# Altium PCB HEBoard_Ver3.PcbDoc
Units mm, origin at the board's own origin, x right, y up, seen from the top; angles counter-clockwise.
Board outline 44.9 x 65 mm, 2 copper layers (Top Layer, Bottom Layer); 22 components, 17 nets, 116 pads, 36 vias.
Unrouted connection lines stored in the file: 3.
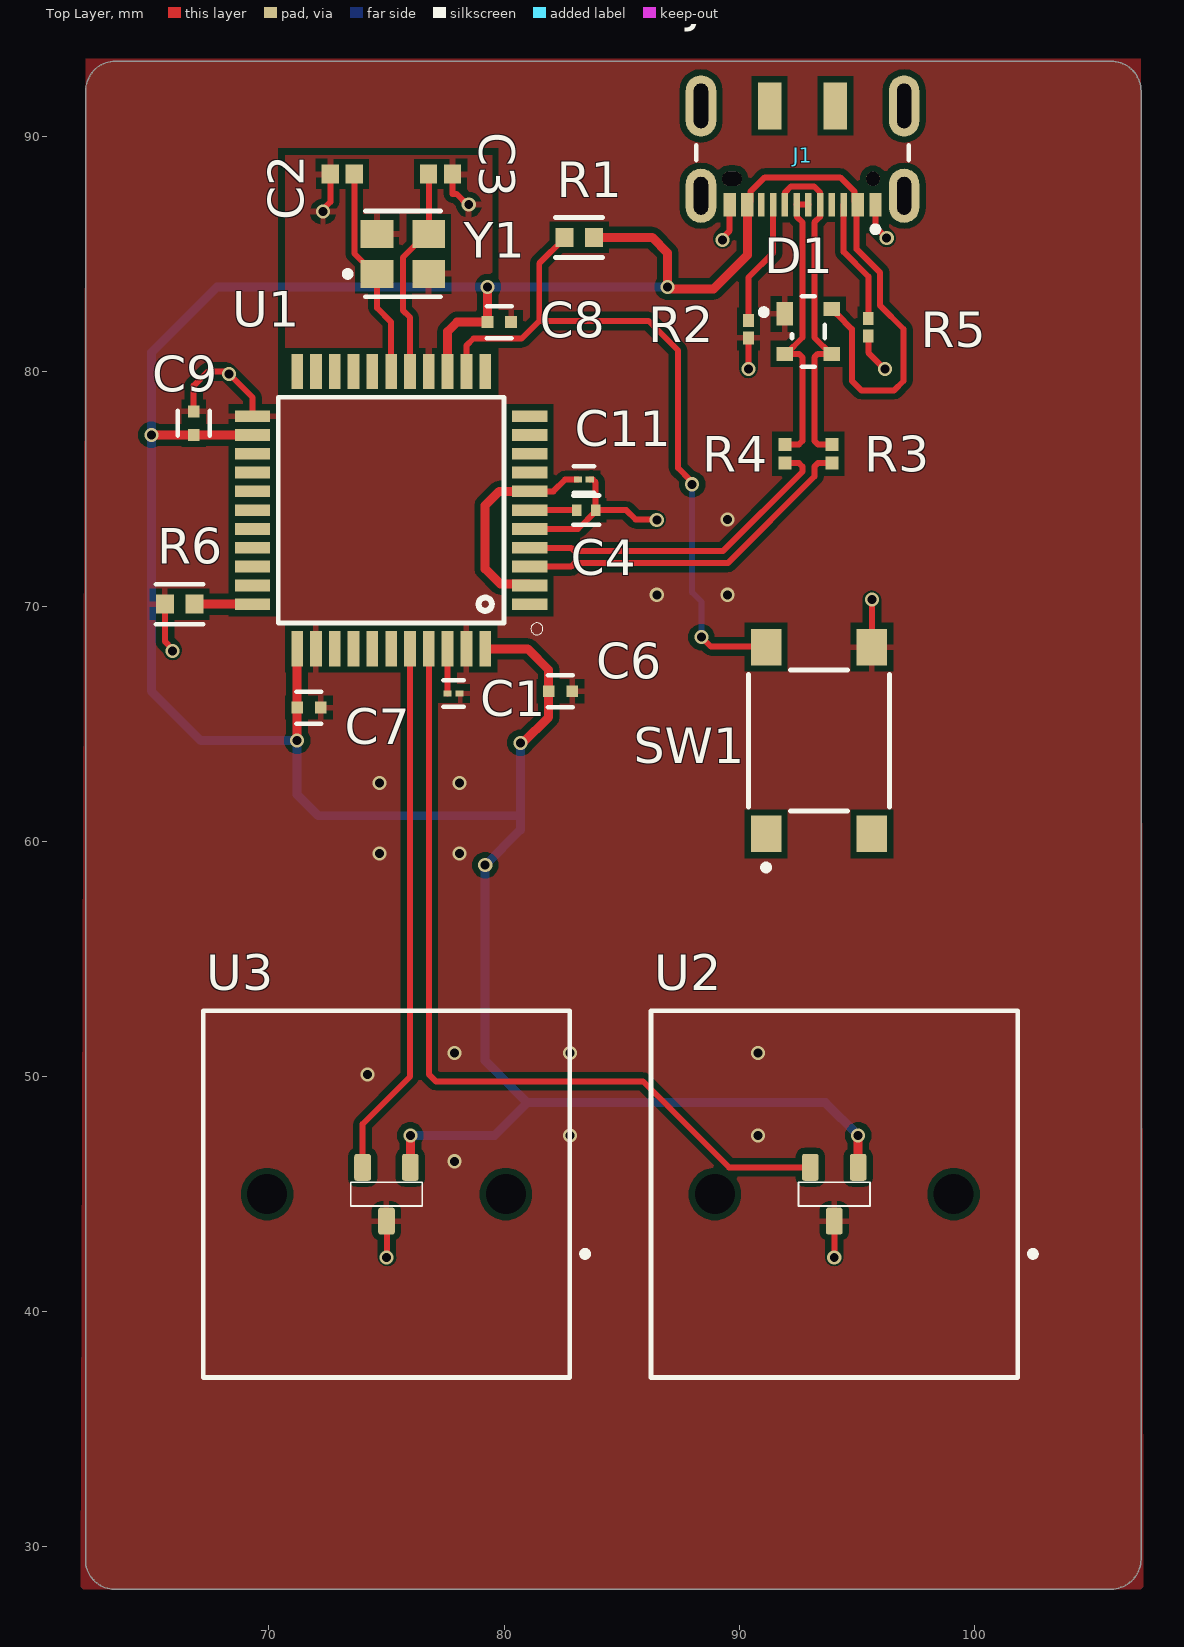
[diagram p0: Top Layer view]
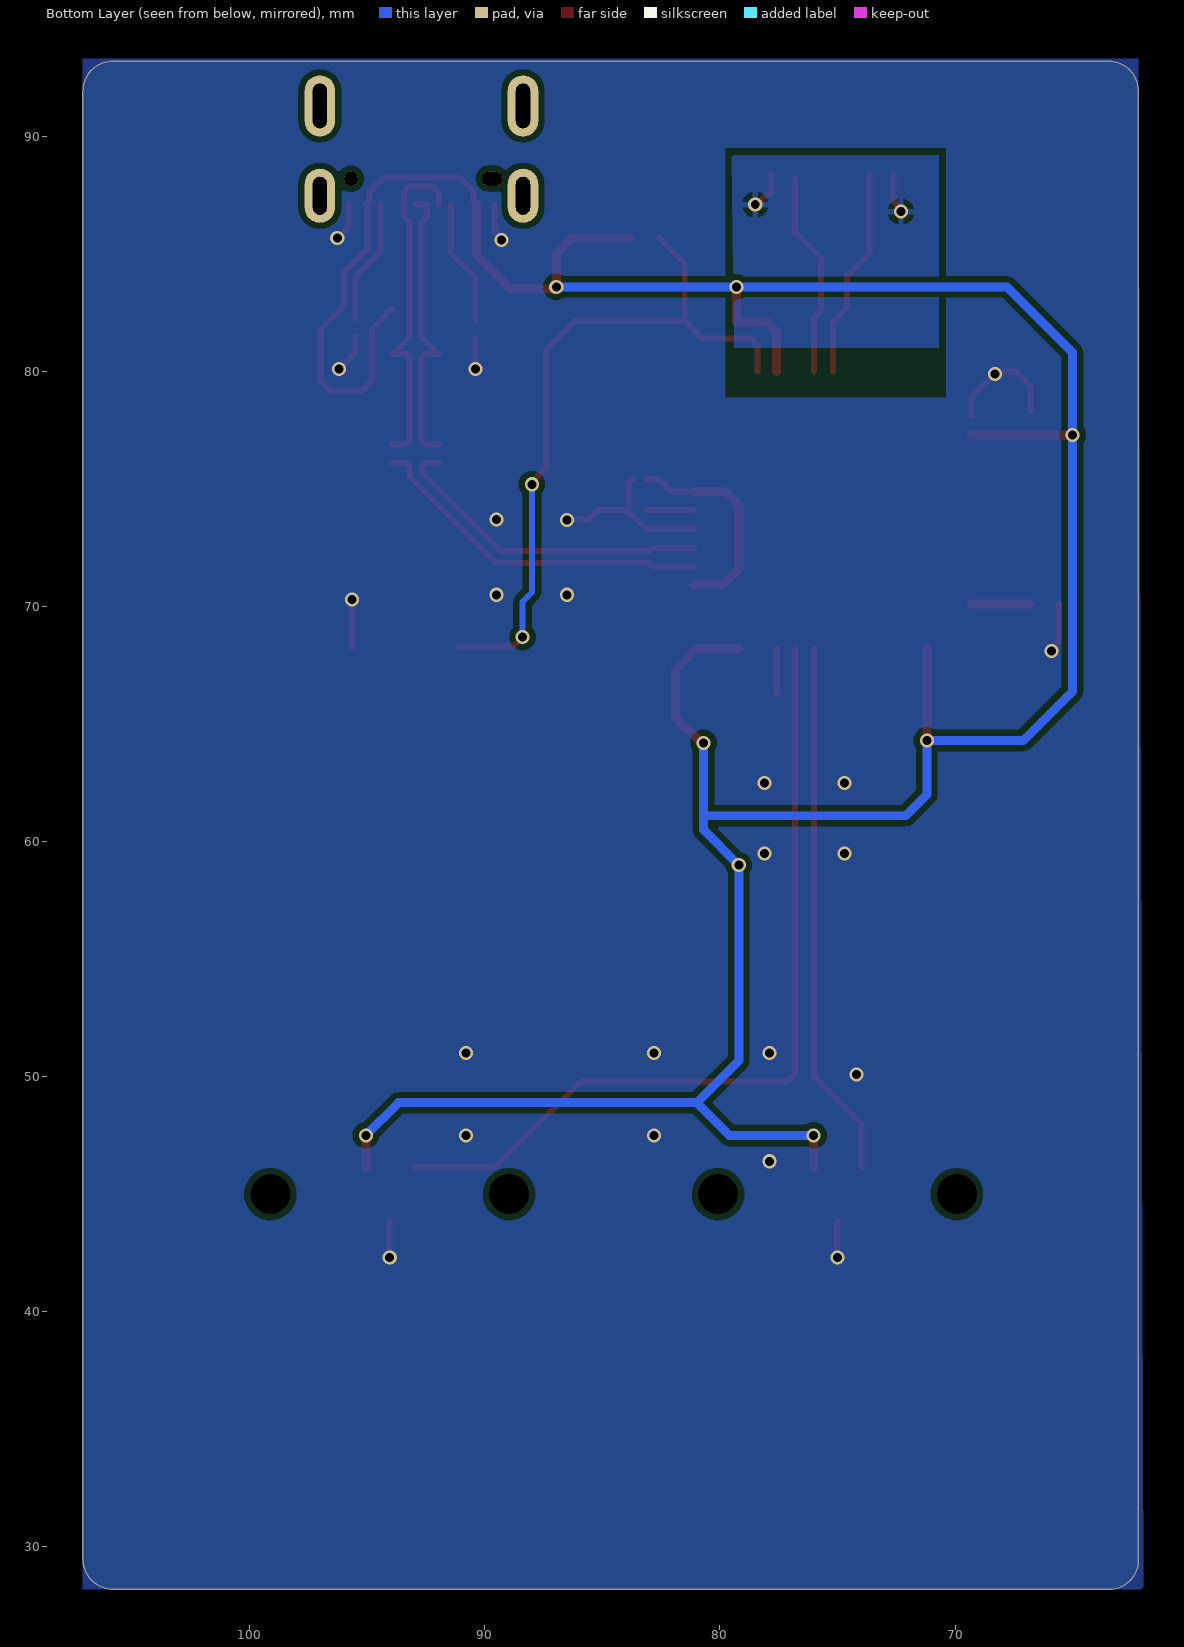
[diagram p1: Bottom Layer view, seen from below]
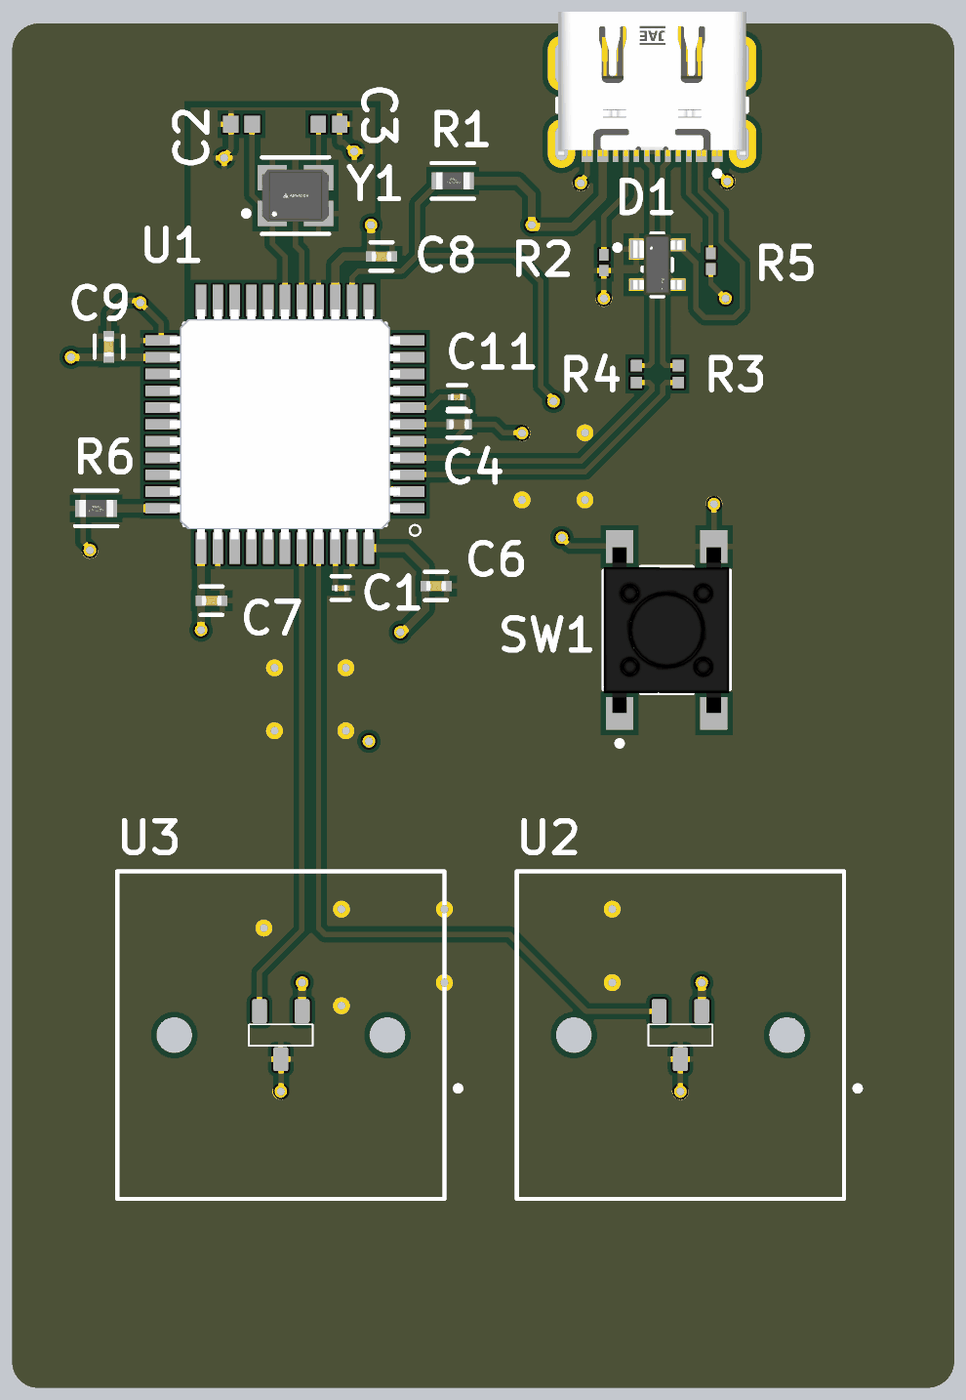
[diagram p2: 3D render of the assembled board from above, using the file's embedded part models]

## Layer stack, top to bottom
Top Solder: solder mask 0.0102, Solder Resist, Dk 3.5
Top Layer: signal copper 0.0356
Dielectric 1: dielectric 0.32, FR-4, Dk 4.8
Bottom Layer: signal copper 0.0356
Bottom Solder: solder mask 0.0102, Solder Resist, Dk 3.5

## Board outline
62.2,29.423 ccw(c63.423,29.423) 63.423,28.2 105.83,28.2 ccw(c105.83,29.47) 107.1,29.47 107.1,91.93 ccw(c105.83,91.93) 105.83,93.2 63.47,93.2 ccw(c63.47,91.93) 62.2,91.93

## Design rules (kind name [scope] priority, off if disabled: settings)
Clearance [All] p1: gap=0.254 ignorepadtopadclearanceinfootprint=FALSE except(0: Arc-Hole Track-Hole SMDPad-Hole THPad-Hole Via-Hole Fill-Hole Poly-Hole Region-Hole Text-Hole; 0.14: Arc-Arc Arc-Track Arc-SMDPad Arc-Text Track-Track Track-SMDPad Track-Text SMDPad-SMDPad SMDPad-Text THPad-Text Via-Text Fill-Text Poly-Text Region-Text Text-Text)
DiffPairsRouting [All] p1: maxlimit=100 minlimit=0.254 mostfreqgap=0.254 toplayer_mingap=0 toplayer_minwidth=0.254 toplayer_maxwidth=0.381 toplayer_prefwidth=0.254 bottomlayer_maxgap=0.254 bottomlayer_minwidth=0.381 bottomlayer_maxwidth=0.381 bottomlayer_prefwidth=0.381 maxuncoupledlength=12.7
MinimumSolderMaskSliver [All] p1: minsoldermaskwidth=0.07
PlaneConnect [All] p1: planeconnectstyle=Direct reliefexpansion=0.508 reliefentries=4 reliefconductorwidth=0.254 reliefairgap=0.254
PolygonConnect [All] p1: thpad.connectstyle=Relief thpad.reliefconductorwidth=0.254 thpad.reliefentries=4 thpad.polygonreliefangle="90 Angle" thpad.airgapwidth=0.254 smdpad.connectstyle=Relief smdpad.reliefconductorwidth=0.254 smdpad.reliefentries=4 smdpad.polygonreliefangle="90 Angle" smdpad.airgapwidth=0.254 via.connectstyle=Direct via.reliefconductorwidth=0.254 via.reliefentries=4 via.polygonreliefangle="90 Angle" via.airgapwidth=0.254
RoutingVias [All] p1: holewidth=0.711 width=1.27 viastyle="Through Hole" minholewidth=0.3 minwidth=0.6 maxholewidth=0.711 maxwidth=1.27
SilkToSolderMaskClearance [IsPad] p1: minsilkscreentomaskgap=0.025 clearancetoexposedcopper=TRUE
SolderMaskExpansion [All] p1: expansion=0.102 istentingtop=FALSE
Width [InNet('D_P')] p1: maxlimit=0.381 minlimit=0.254 preferedwidth=0.254 toplayer_maxwidth=0.254 minimp=50.000000 maximp=50.000000 favimp=50.000000
26 further rules are at their usual default settings.

## Classes and differential pairs
differential pair D: +D_P -D_N

## Components (designator, comment, footprint, x,y, rotation, side; value= is the part's Value field where it differs from the comment)
C1 "0.1uF" FP-GRM033-0_03-IPC_C 77.854,66.3 r0 top
C2 "22pF" CAPC1006X50X20ML10T10 73.125,88.4 r0 top
C3 "22pF" CAPC1006X50X20ML10T10 77.3,88.4 r180 top
C4 "1uF" FP-GRM15-0_1-MFG 83.5,74.1 r0 top
C6 "0.1uF" FP-CC0402-MFG 82.4,66.4 r0 top value="100 nF"
C7 "0.1uF" FP-CC0402-MFG 71.7,65.7 r0 top value="100 nF"
C8 "0.1uF" FP-CC0402-MFG 79.8,82.1 r0 top value="100 nF"
C9 "0.1uF" FP-CC0402-MFG 66.8,77.8 r90 top value="100 nF"
C11 "0.1uF" FP-GRM033-0_03-IPC_C 83.4,75.4 r0 top
D1 "PRTR5V0U2X,215" FP-SOT143B-MFG 92.95,81.7 r0 top
J1 "DX07S016JA1R1500" FP-DX07S016JA1R1500-MFG 92.7,90.3 r180 top
R1 "10K" FP-CRGP0603-IPC_C 83.2,85.7 r0 top value=10KΩ
R2 "5.1k" RESC0603X26X15ML03T05 90.4,81.8 r90 top
R3 "22R 1% 0201(0603)" RESC0201(0603)_M 93.95,76.5 r90 top value="22.00 Ohm"
R4 "22R 1% 0201(0603)" RESC0201(0603)_M 91.95,76.5 r90 top value="22.00 Ohm"
R5 "5.1k" RESC0603X26X15ML03T05 95.5,81.875 r90 top
R6 "10K" FP-CRGP0603-IPC_C 66.2,70.1 r0 top value=10KΩ
SW1 "" FP-PTS645SM43SMTR92LFS-MFG 93.4,64.3 r90 top
U1 "ATMEGA32U4-AU" QFP80P1200X1200X120-44N 75.2,74.1 r180 top
U2 "SS39ET" CHRY-MX1A-11NW_V 94.05,45 r180 top
U3 "SS39ET" CHRY-MX1A-11NW_V 75,45 r180 top
Y1 "16 MHz" FP-ABM8G-MFG 75.7,85 r0 top

## Footprints (in the part's own frame and the unit in brackets; to place one, negate y for a bottom-side part, rotate by r counter-clockwise, add the part's x,y. Pads: shape width x height; smd on the part's side, far side on the other; paste and mask are expansions set on the pad)
CAPC1006X50X20ML10T10 [mm] "Chip Capacitor, 2-Leads, Body 1.00x0.55mm, IPC Low Density"
  rect 0.74x0.8 smd: 1(-0.51,0) 2(0.51,0)
  body extent -0.55,-0.33 0.55,0.32, height 0.5
CHRY-MX1A-11NW_V [mil] "THD, 2-Leads, Body 15.6x15.6mm"
  rrect30% 28x45 smd: 1(-40,-45) 2(40,-45) 3(0,45)
  round 0 hole 67 unplated paste+0: MH2(-200,0) MH3(200,0)
  silkscreen extent -338,-307 307,307, body extent -307,-307 307,307, height 598
FP-ABM8G-MFG [mm]
  rect 1.4x1.2 smd paste+0 mask+0: 1(-1.1,-0.85) 2(1.1,-0.85) 3(1.1,0.85) 4(-1.1,0.85)
  silkscreen extent -2.47,-1.83 1.6,1.83, body extent -1.9,-1.55 1.9,1.55, height 0.25
FP-CC0402-MFG [mm]
  rect 0.5x0.5 smd paste+0 mask+0: 1(-0.5,0) 2(0.5,0)
  silkscreen extent -0.53,-0.68 0.53,0.67, body extent -0.87,-0.48 0.87,0.48, height 0.25
FP-CRGP0603-IPC_C [mm]
  rect 0.758x0.812 smd paste+0 mask+0: 1(-0.627,0) 2(0.627,0)
  silkscreen extent -1.01,-0.85 1.01,0.85, body extent -1.11,-0.55 1.11,0.55, height 0.25
FP-DX07S016JA1R1500-MFG [mm]
  rrect100% 1.3x2.3 hole 1.6 slot 0.6 at 0 deg paste-1000 mask+0: 1(-4.32,2.825) 2(4.32,2.825)
  rrect100% 1.3x2.6 hole 1.9 slot 0.6 at 0 deg paste-1000 mask+0: 3(-4.32,-1) 6(4.32,-1)
  rect 1x2 smd paste+0 mask+0: 4(-1.4,-1) 5(1.4,-1)
  rect 0.52x1 smd paste+0 mask+0: A1/B12(-3.1,3.2) A4/B9(-2.35,3.2) A12/B1(3.1,3.2) B4/A9(2.35,3.2)
  rect 0.27x1 smd paste+0 mask+0: A5(-1.75,3.2) A6(-0.25,3.2) A7(0.75,3.2) A8(1.75,3.2) B5(1.25,3.2) B6(0.25,3.2) B7(-0.75,3.2) B8(-1.25,3.2)
  round 0.6 hole 0.6 unplated paste-1000 mask+0: ""(-3,2.1)
  rrect100% 0.85x0.6 hole 0.6 slot 0.85 at 0 deg unplated paste-1000 mask+0: ""(3,2.1)
  silkscreen extent -4.52,0.67 4.52,4.37, body extent -5.07,-3.75 5.07,4.08, height 0.25
FP-GRM15-0_1-MFG [mm]
  rect 0.4x0.5 smd paste+0 mask+0: 1(-0.4,0) 2(0.4,0)
  silkscreen extent -0.55,-0.63 0.55,0.63, body extent -0.7,-0.38 0.7,0.38, height 0.25
FP-GRM033-0_03-IPC_C [mm]
  rect 0.354x0.263 smd paste+0 mask+0: 1(-0.254,0) 2(0.254,0)
  silkscreen extent -0.43,-0.57 0.43,0.57, body extent -0.53,-0.27 0.53,0.27, height 0.25
FP-PTS645SM43SMTR92LFS-MFG [mm]
  rect 1.55x1.3 smd paste+0 mask+0: 1(-3.975,2.25) 2(3.975,2.25) 3(-3.975,-2.25) 4(3.975,-2.25)
  silkscreen extent -5.52,-3 3,3, body extent -4.85,-3.1 4.85,3.1, height 0.25
FP-SOT143B-MFG [mm]
  rect 0.7x1 smd paste-1000 mask+0: 1(-1,0.75)
  rect 0.7x0.6 smd paste-1000 mask+0: 2(-1,-0.95) 3(1,-0.95) 4(1,0.95)
  silkscreen extent -2.02,-1.5 0.7,1.5, body extent -1.5,-1.63 1.5,1.63, height 0.25
QFP80P1200X1200X120-44N [mm]
  rect 1.5x0.5 smd: 1(-5.9,4) 2(-5.9,3.2) 3(-5.9,2.4) 4(-5.9,1.6) 5(-5.9,0.8) 6(-5.9,0) 7(-5.9,-0.8) 8(-5.9,-1.6) 9(-5.9,-2.4) 10(-5.9,-3.2) 11(-5.9,-4) 23(5.9,-4) 24(5.9,-3.2) 25(5.9,-2.4) 26(5.9,-1.6) 27(5.9,-0.8) 28(5.9,0) 29(5.9,0.8) 30(5.9,1.6) 31(5.9,2.4) 32(5.9,3.2) 33(5.9,4)
  rect 0.5x1.5 smd: 12(-4,-5.9) 13(-3.2,-5.9) 14(-2.4,-5.9) 15(-1.6,-5.9) 16(-0.8,-5.9) 17(0,-5.9) 18(0.8,-5.9) 19(1.6,-5.9) 20(2.4,-5.9) 21(3.2,-5.9) 22(4,-5.9) 34(4,5.9) 35(3.2,5.9) 36(2.4,5.9) 37(1.6,5.9) 38(0.8,5.9) 39(0,5.9) 40(-0.8,5.9) 41(-1.6,5.9) 42(-2.4,5.9) 43(-3.2,5.9) 44(-4,5.9)
  silkscreen extent -6.45,-4.8 4.8,5.3, body extent -6,-6 6,6, height 0.53
RESC0201(0603)_M [mm] "Chip Resistor, Body 0.6x0.3mm, IPC Low Density"
  rect 0.55x0.55 smd: 1(-0.4,0) 2(0.4,0)
  body extent -0.31,-0.16 0.31,0.16, height 0.3
RESC0603X26X15ML03T05 [mm] "Chip Resistor, 2-Leads, Body 0.60x0.30mm, IPC Low Density"
  rect 0.55x0.45 smd: 1(-0.375,0) 2(0.375,0)
  body extent -0.32,-0.16 0.32,0.17, height 0.26

## Part data
C1 C11: library part CMP-2010-01264-2, "Chip Multilayer Ceramic Capacitors for General Purpose, 0201, 0.10uF, X5R, 15%, 10%, 10V", Capacitance=100nF, Case Code (Imperial)=0201, Case Code (Metric)=0603, Dielectric=X5R, Max Operating Temperature=85°C, Min Operating Temperature=-55°C, Package Quantity=1, Tolerance=10%, Voltage=10V, Case/Package=0201, Depth=0.3mm, Height=0.3mm, Lead Free="Lead Free", Length=0.6mm, Mount="Surface Mount", Packaging="Tape and Reel", Radiation Hardening=No, REACH SVHC="No SVHC", Termination=SMD/SMT, Thickness=0.013inch, Voltage Rating=10V, Voltage Rating (DC)=10V, Weight=6E-06oz, Width=0.012inch
C2 C3: library part CMP-2008-04844-1, Manufacturer="AVX Interconnect / Elco", Part Number=0402ZK220GBSTR..
C4: library part CMP-2008-04556-2, "CAP CER 1UF 10V X5R 0402", Manufacturer=Murata, Manufacturer Part Number=GRM155R61A105KE15D, Package=GRM15-0.1, Temperature="-55°C to +85°C", Temperature Characteristic=X5R, Temperature Coefficient=15%, Temperature Range High=+85°C, Temperature Range Low=-55°C, Tolerance=10%, Voltage Rating=10V, Automotive=No, Capacitance=1uF, Category=Cap, ComponentLink2Description=Datasheet, ComponentLink2URL=https://search.murata.co.jp/Ceramy/image/img/A01X/G101/ENG/GRM155R61A105KE15-01A.pdf, Device Class L1="Passive Components", Device Class L2=Capacitors, Device Class L3="Ceramic Capacitors", Digikey Description="CAP CER 1UF 10V X5R 0402", Height=0.55mm, Ipc Land Pattern Name=CAPC10050X50, Lead Free=Yes, Material=Ceramic, Mouser Description="0402 1 uF 10 V ±10% Tolerance X5R Surface Mount Multilayer Ceramic Capacitor", Octopart=https://octopart.com/grm155r61a105ke15d-murata-197442, RoHS=TRUE
C6 C7 C8 C9: library part CMP-03422-000748-1, "CAP CER 0.1UF 10V X7R 0402", Capacitance="100 nF", Manufacturer=YAGEO, Manufacturer Part Number=CC0402KRX7R6BB104, Package=CC0402, Temperature="-55°C to +125°C", Temperature Characteristic=X7R, Temperature Coefficient=30ppm/°C, Temperature Range High=+125°C, Temperature Range Low=-55°C, Tolerance=0.1, Voltage Rating="10 V", Automotive=No, Automotive Grade=NA, Category=Cap, ComponentLink2Description=Datasheet, ComponentLink2URL=http://www.yageo.com/documents/recent/UPY-GP_NP0_16V-to-50V_16.pdf, Device Class L1="Passive Components", Device Class L2=Capacitors, Device Class L3="Ceramic Capacitors", Digikey Description="CAP CER 0.1UF 10V X7R 0402", Footprint Url=http://www.yageo.com/exep/pages/download/literatures/UPY-C_GEN_24.pdf, Height=0.55mm, Ipc Land Pattern Name=CAPC10050X50, Lead Free=Yes, Material=Ceramic, Mouser Description="Multilayer Ceramic Capacitors MLCC - SMD/SMT 100nF 10V X7R 10%", Octopart=https://octopart.com/cc0402krx7r6bb104-yageo-8376509, RoHS=TRUE
D1: library part CMP-14436-000007-1, "TVS DIODE 5.5V SOT143B"
J1: library part CMP-19038-000003-1, "CONN RCP USB2.0 TYP C 24P SMD RA"
R1 R6: library part CMP-03211-004414-1, "CRGP 0603 10K 1%", Ambient Temperature Range High=+70°C, Manufacturer=TE, Manufacturer Part Number=CRGP0603F10K, Package=CRGP0603, Power Rating=0.25W, Resistance=10KΩ, Temperature="-55°C to +155°C", Temperature Coefficient=±100ppm/°C, Temperature Range High=+155°C, Temperature Range Low=-55°C, Tolerance=0.01, Voltage Rating=50V, Automotive=No, Category=Res, ComponentLink2Description=Datasheet, ComponentLink2URL=https://www.te.com/commerce/DocumentDelivery/DDEController?Action=srchrtrv&DocNm=9-1773463-9&DocType=DS&DocLang=English, Composition="Thick Film", Device Class L1="Passive Components", Device Class L2=Resistors, Device Class L3="Chip SMD Resistors", Digikey Description="CRGP 0603 10K 1%", Height=0.55mm, Ipc Land Pattern Name=RESC16080X45, Lead Free=Yes, Mouser Description="Res, 10K, 1%, 0.25W, 0603, Thick Film", Octopart=https://octopart.com/crgp0603f10k-te+connectivity-91018721, RoHS=TRUE, Series=CRGP
R2 R5: library part CMP-2004-03550-1, Manufacturer=Panasonic, Part Number=ERJ1GNF5101C
R3 R4: library part CMP-1010-00226-1, "22R 0.05W 1% 0201 (0603 Metric)  SMD", Case-EIA=0201, Case-Metric=0603, Power="0.05 W", Tolerance="1 %", Technology=SMT
SW1: library part CMP-2000-05160-2, "SWITCH TACTILE SPST-NO 0.05A 12V", Case/Package=SMD/SMT, Color=Black, Contact Resistance=100mR, Current Rating=50mA, Max Operating Temperature=60°C, Max Voltage Rating (DC)=12V, Min Operating Temperature=-20°C, Operating Force=160gf, Package Quantity=1, Actuator Length=0.85mm, Actuator Material=Nylon, Actuator Type=Standard, Contact Material=Silver, Contact Plating=Silver, Depth=9mm, Illumination Type=Non-Illuminated, Lead Free="Lead Free", Length=6mm, Max Current Rating=50mA, Mechanical Life=100000Cycles, Mount="Surface Mount", Orientation=Straight, Packaging="Tape and Reel", REACH SVHC="No SVHC", Switch Function=Off-Mom, Termination="Gull Wing", Throw Configuration=SPST, Voltage Rating (DC)=12V
U1: "AVR AVRÂ® ATmega Microcontroller IC 8-Bit 16MHz 32KB (16K x 16) FLASH 44-TQFP (10x10)", Package="TQFP-44 Microchip", Availability="In Stock", MF="Microchip Technology", MP=ATMEGA32U4-AU, Price=None, Purchase-URL=https://pricing.snapeda.com/search/part/ATMEGA32U4-AU/?ref=eda
U2 U3: "analog Hall Effect Sensor 1.5 mA 2.7 - 6.5 V dc", Package=None, Check_prices=https://www.snapeda.com/parts/SS39ET/Honeywell+Sensing+and+Productivity+Solutions/view-part/?ref=eda, MF="Honeywell Sensing and Productivity Solutions", MP=SS39ET, SnapEDA_Link=https://www.snapeda.com/parts/SS39ET/Honeywell+Sensing+and+Productivity+Solutions/view-part/?ref=snap
Y1: library part CMP-27762-015134-1, "Crystal 16MHz ±30ppm (Tol) ±30ppm (Stability) 10pF FUND 80Ω 4-Pin SMD T/R", Case/Package=SMD/SMT, ESR (Equivalent Series Resistance)=80R, Frequency=16MHz, Frequency Stability=30ppm, Load Capacitance=10pF, Max Operating Temperature=60°C, Min Operating Temperature=-10°C, Depth=2.5mm, Frequency Tolerance=30ppm, Height=0.039inch, Lead Free="Lead Free", Length=3.2mm, Mount="Surface Mount", Number of Pins=4, Packaging="Tape and Reel", REACH SVHC="No SVHC", Series=ABM8G, Series Resistance=80R, Width=0.098inch

## Via types
v1: diameter 0.6, hole 0.381, Top Layer to Bottom Layer, 36 vias

## Nets (pads, with @x,y where several pads share a name; then routed paths per layer and width w, separated by ;. In a path a pad name is that pad's centre, name@x,y a point inside that pad or via, vN(x,y) a via of type N, cw(c..) or ccw(c..) an arc to the next point about the centre after c; other vN are vias at no path point)
+5V: C6.1 C7.1 C8.1 C9.1 D1.4 J1.A4/B9 J1.B4/A9 R1.2 U1.14 U1.24 U1.34 U1.44 U2.1 U3.1 | length 147.9
  Top Layer w0.254: J1.B4/A9 90.483,87.233 90.483,87.646 91.098,88.261 94.302,88.261 94.917,87.646 94.917,87.233 J1.A4/B9 95,87.05 95,85.2 96,84.2 96,82.8 96.995,81.805 96.995,79.595 96.6,79.2 95.2,79.2 94.8,79.6 94.8,81.8 94.173,82.427 94.173,82.477 94,82.65 D1.4
  Top Layer w0.381: v1(65,77.3) C9.1 U1.24 ; v1(71.2,64.3) C7.1 U1.34 ; U3.1 v1(76.016,47.5) ; U1.14 77.6,81.7 78,82.1 C8.1 v1(79.3,83.6) ; U1.44 81,68.2 81.9,67.3 C6.1 81.9,65.3 80.8,64.2 v1(80.7,64.2) ; R1.2 86.3,85.7 86.963,85.037 v1(86.963,83.6) ; v1@86.963,83.513 88.913,83.513 90.35,84.95 J1.B4/A9 ; U2.1 v1(95.066,47.5)
  Bottom Layer w0.381: v1(76.016,47.5) 79.6,47.5 80.992,48.892 ; v1@80.65,64.25 v1(80.7,64.2) 80.7,61.1 ; v1(86.963,83.6) v1(79.3,83.6) 67.8,83.6 65,80.8 v1(65,77.3) 65,66.4 67.1,64.3 v1(71.2,64.3) 71.2,62 72.1,61.1 80.7,61.1 ; v1(95.066,47.5) 93.674,48.892 80.992,48.892 ; 80.7,61.1 80.7,60.5 v1(79.2,59) 79.2,50.684 80.992,48.892
D_N: D1.3 J1.A7 J1.B7 R3.1 R3.2 U1.3 | length 29.6
  Top Layer w0.254: U1.3 82.854,71.7 83,71.846 89.52,71.846 93.204,75.53 93.204,75.951 93.353,76.1 R3.1 ; J1.A7 91.958,87.108 91.958,87.621 92.204,87.867 93.196,87.867 93.442,87.621 93.442,87.108 J1.B7 93.442,87.092 93.442,86.579 93.204,86.341 93.204,81.446 D1.3@93.9,80.75 ; R3.2 93.353,76.9 93.204,77.049 93.204,80.601 93.353,80.75 D1.3@93.9,80.75 ; D1.3 D1.3@93.9,80.75
D_P: D1.2 J1.A6 J1.B6 R4.1 R4.2 U1.4 | length 26.5
  Top Layer w0.254: U1.4 82.854,72.5 83,72.354 89.309,72.354 92.696,75.741 92.696,75.951 92.547,76.1 R4.1 ; R4.2 92.547,76.9 92.696,77.049 92.696,80.601 92.547,80.75 D1.2@92,80.75 ; D1.2 D1.2@92,80.75 ; J1.A6 J1.B6 92.458,87.092 92.458,86.579 92.696,86.341 92.696,81.446 D1.2@92,80.75
GND: C1.2 C2.1 C3.1 C4.2 C6.2 C7.2 C8.2 C9.2 C11.2 D1.1 J1.A1/B12 J1.A12/B1 R2.1 R5.1 R6.1 SW1.4 U1.5 U1.15 U1.23 U1.35 U1.43 U2.3 U3.3 Y1.2 Y1.4 | length 29.5
  Top Layer w0.254: R6.1 65.573,68.521 65.9,68.194 v1(65.9,68.1) ; C9.2 66.8,79.4 67.4,80 68.2,80 v1(68.3,79.9) 69.3,78.9 U1.23 ; v1(72.3,86.8) 72.3,86.894 72.615,87.209 C2.1 ; U3.3 75.015,43.842 75.015,42.329 v1@75.03,42.314 ; C3.1 77.81,87.549 77.986,87.549 78.435,87.1 v1(78.5,87.1) ; U1.5 83.15,73.3 83.9,74.05 C4.2 ; C11.2 83.783,75.4 83.9,75.283 C4.2 ; v1(86.5,73.683) 86.483,73.7 85.6,73.7 85.2,74.1 C4.2 ; v1(89.3,85.6) 89.3,85.694 89.6,85.994 J1.A12/B1 ; v1(90.4,80.1) R2.1 ; v1(94.05,42.314) U2.3 ; R5.1 95.5,80.8 v1(96.2,80.1) ; SW1.4 v1(95.65,70.3) ; J1.A1/B12 95.8,86.154 v1@96.281,85.673
  other v1: 75,42.314 77.891,46.4 82.8,47.5 90.8,47.5 74.191,50.1 77.891,51 82.8,51 90.8,51 74.7,59.5 78.1,59.5 74.7,62.5 78.1,62.5 86.5,70.5 89.5,70.5 89.5,73.7 96.281,85.673
KEY_1: U1.41 U2.2 | length 36
  Top Layer w0.254: U1.41 76.8,50.1 77.1,49.8 85.912,49.8 89.569,46.143 U2.2
KEY_2: U1.40 U3.2 | length 22.9
  Top Layer w0.254: U3.2 73.984,47.984 76,50 U1.40
NetC1_1: C1.1 U1.42 | length 1.9
  Top Layer w0.254: C1.1 U1.42@77.6,68.2
NetC4_1: C4.1 U1.6 | length 2
  Top Layer w0.254: U1.6 C4.1
NetC11_1: C11.1 U1.2 U1.7 | length 9.3
  Top Layer w0.254: U1.7 82.1,74.9 82.596,75.396 83.141,75.396 C11.1
  Top Layer w0.381: U1.2 81.041,70.959 79.841,70.959 79.2,71.6 79.2,74.3 79.8,74.9 U1.7
NetJ1_A5: J1.A5 R5.2 | length 5.3
  Top Layer w0.254: J1.A5 94.45,85.092 95.5,84.042 R5.2
NetJ1_A6: 
NetJ1_A7: 
NetJ1_B5: J1.B5 R2.2 | length 5.4
  Top Layer w0.254: R2.2 90.4,84.004 91.45,85.054 J1.B5
NetR1_1: R1.1 SW1.2 U1.13 | length 30.3
  Top Layer w0.254: U1.13 78.4,81.1 78.7,81.4 80.751,81.4 81.5,82.148 ; R1.1 82.573,85.673 81.5,84.6 81.5,82.148 ; v1@87.9,75.4 87.4,75.9 87.4,80.9 86.152,82.148 81.5,82.148 ; v1(88.4,68.7) 88.8,68.3 91.125,68.3 SW1.2
  Bottom Layer w0.254: v1(88,75.2) 88,70.6 88.4,70.2 v1(88.4,68.7)
NetR6_2: R6.2 U1.33 | length 2.5
  Top Layer w0.381: R6.2 U1.33
XTAL_1: C2.2 U1.17 Y1.1 | length 9.1
  Top Layer w0.254: C2.2 73.633,88.398 73.633,85.017 74.5,84.15 Y1.1 74.6,82.7 75.2,82.1 U1.17
XTAL_2: C3.2 U1.16 Y1.3 | length 8.8
  Top Layer w0.254: U1.16 76,82.3 75.7,82.6 75.7,84.85 76.7,85.85 Y1.3 C3.2@76.8,88.19
pads on no net: J1. J1.1 J1.2 J1.3 J1.4 J1.5 J1.6 J1.A8 J1.B8 SW1.1 SW1.3 U1.1 U1.8 U1.9 U1.10 U1.11 U1.12 U1.18 U1.19 U1.20 U1.21 U1.22 U1.25 U1.26 U1.27 U1.28 U1.29 U1.30 U1.31 U1.32 U1.36 U1.37 U1.38 U1.39 U2.MH2 U2.MH3 U3.MH2 U3.MH3

## Polygon pours and split planes (outlines as drawn)
GND on Top Layer "GND_L01_P008" (solid, pour order 8): 62.2,93.297 62,28.2 107.188,28.2 107.098,93.297
GND on Top Layer "GND_L01_P007" (solid, pour order 7): 70.7,89.2 70.7,79.4 79.5,79.31 79.5,89.2
GND on Bottom Layer "GND_L02_P005" (solid, remove dead copper, pour order 5): 62.2,93.297 62,28.2 107.1,28.2 107.1,93.297
GND on Bottom Layer "GND_L02_P009" (solid, pour order 9): 70.7,89.2 70.7,81.004 79.4,81 79.5,89.2

## Other copper
Bottom Layer:
  pour cut-out: 70.4,89.5 70.4,78.9 79.745,78.9 79.745,89.5

## Silkscreen, mask and mechanical layers (free items; w line width, h text height)
Mechanical 1:
  lines w0.254: 62.2,29.423 ccw(c63.423,29.423) 63.423,28.2 66.8,28.2 105.83,28.2 ccw(c105.83,29.47) 107.1,29.47 107.1,91.93 ccw(c105.83,91.93) 105.83,93.2 63.47,93.2 ccw(c63.47,91.93) 62.2,91.93 62.2,29.423